# EAGLE board sensor_board_v4 (EAGLE 7.5.0)
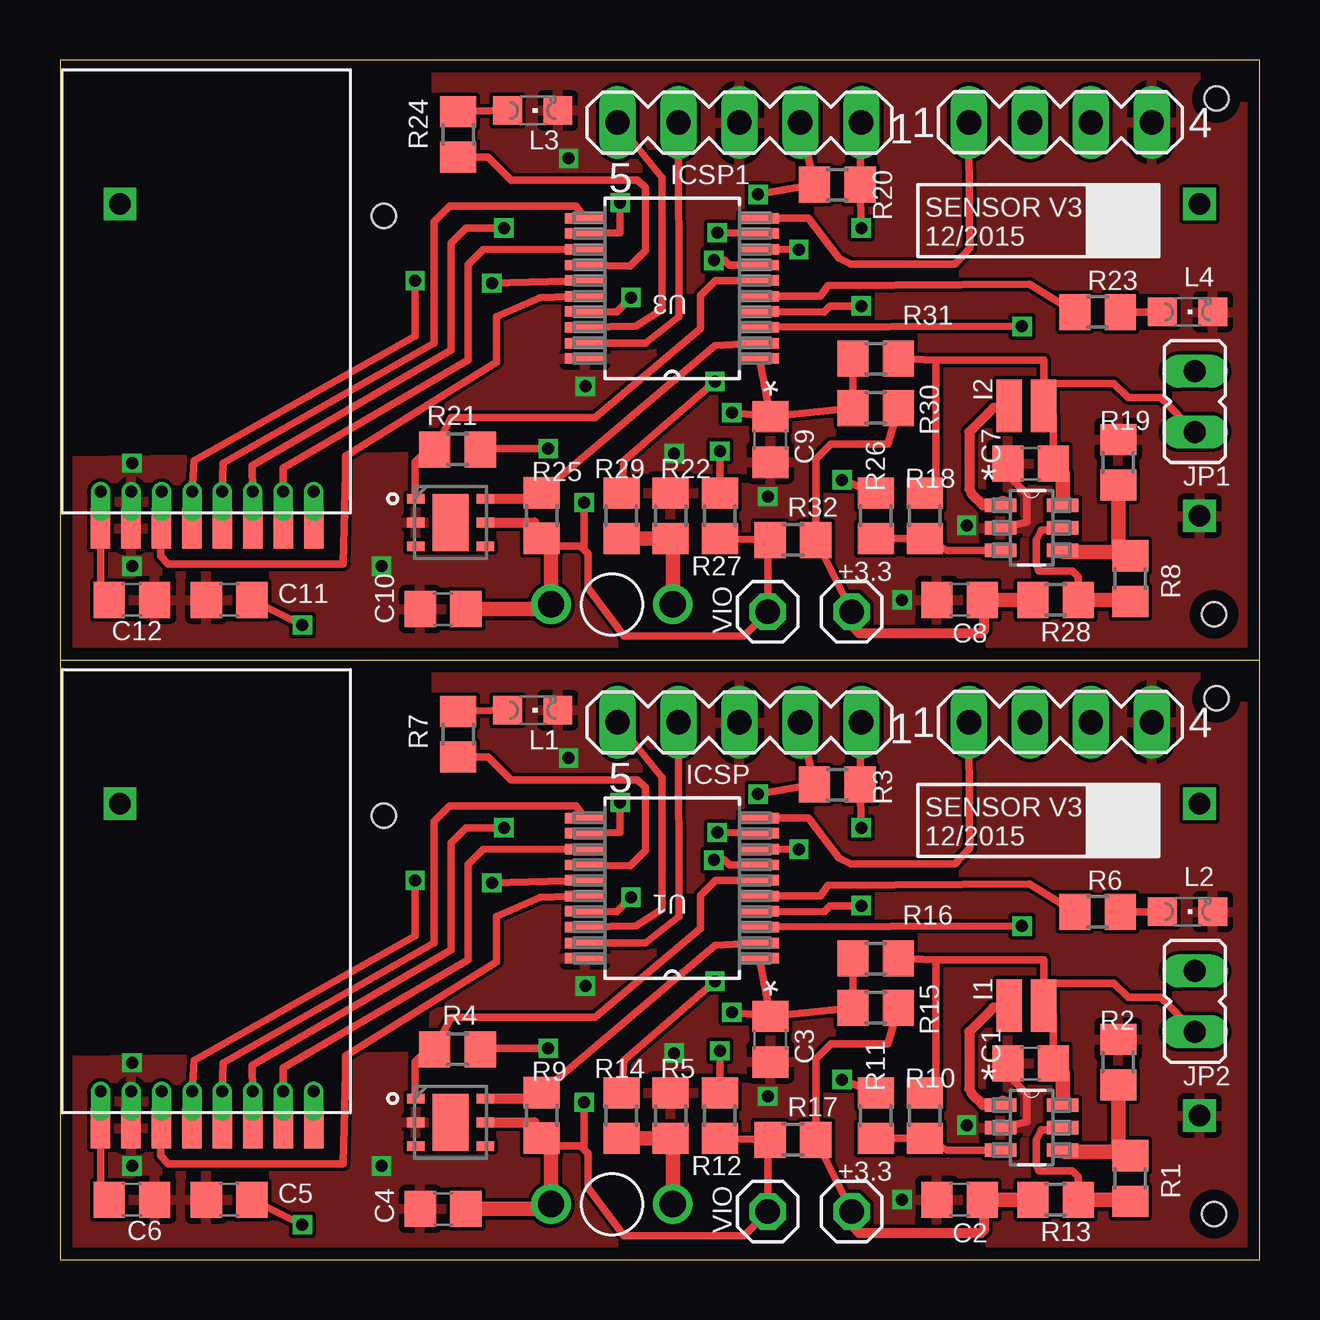
[diagram p0: board, top side]
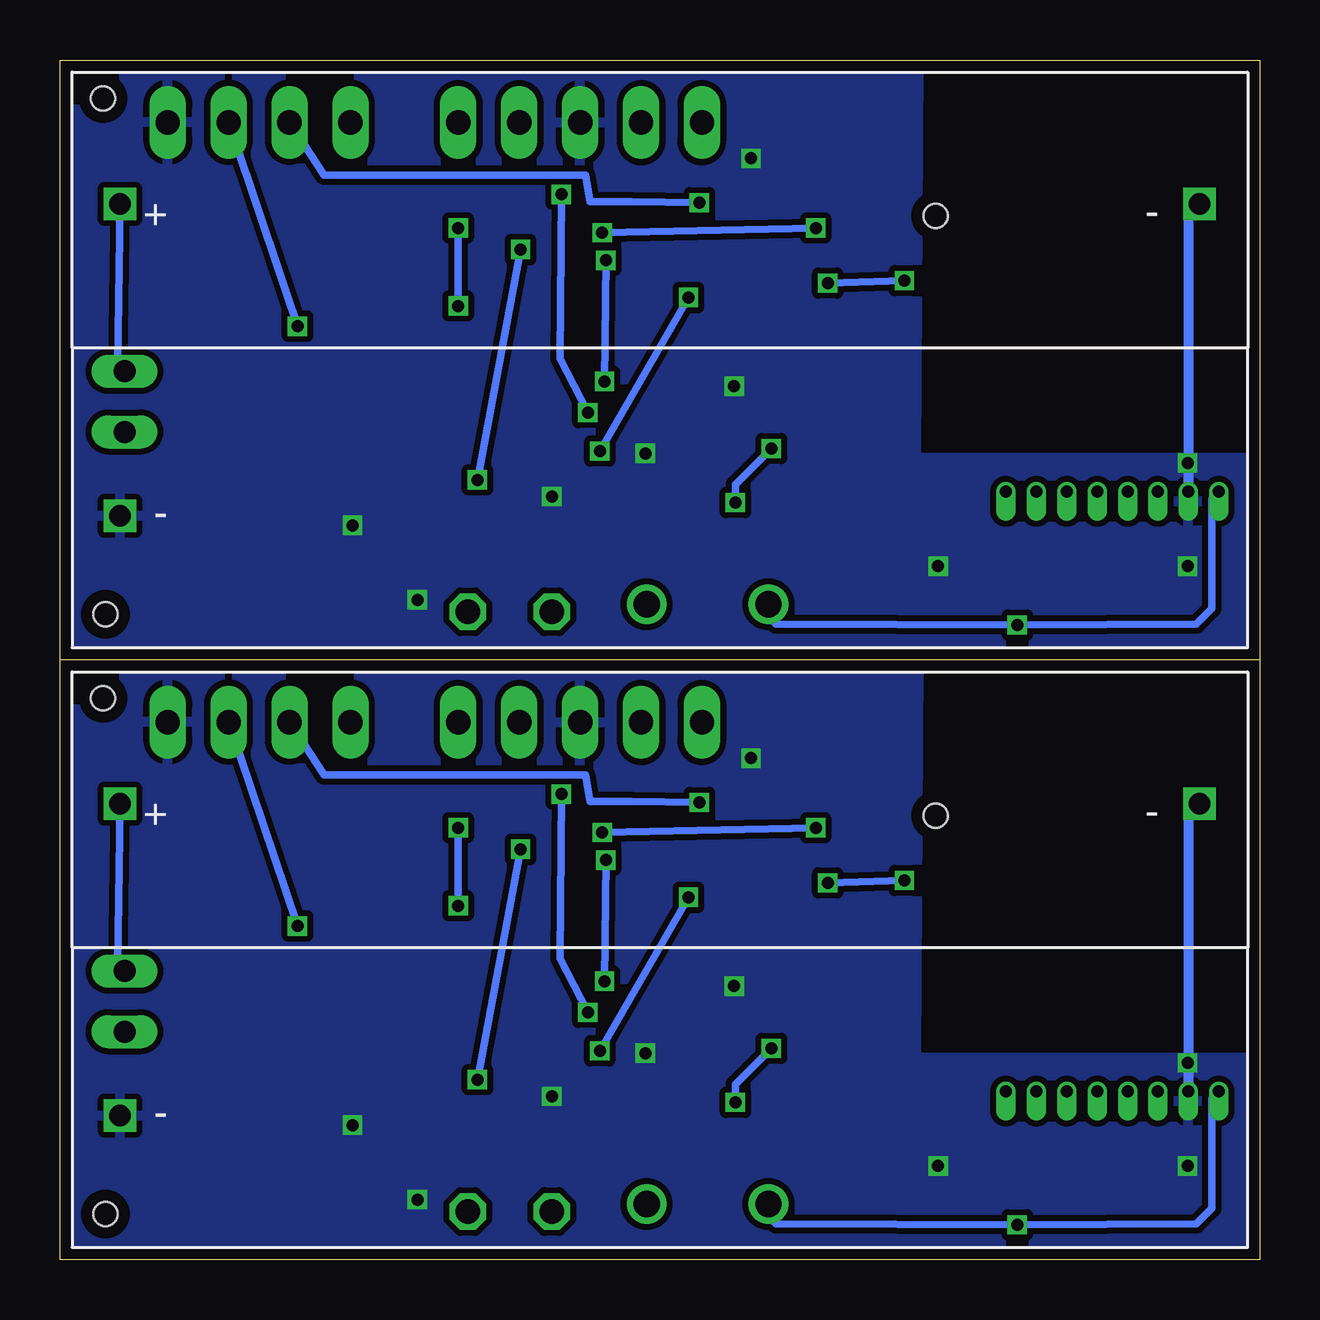
[diagram p1: board, bottom side, seen from below]

Size 50 x 50 mm. Coordinates in mm from the lower left corner, seen from the top.
Outline: 50,25 50,0 0,0 0,25
Outline: 50,25 50,50 0,50 0,25
Outline: 0,25 50,25
Copper layers (1*16): Top 0.035mm / dielectric 1.6mm / Bottom 0.035mm
Design rules "Elecrow_2-layer_PCB_eagle_rule": minimum track width 6mil, minimum drill 12mil, track to track 6mil, track to pad 6mil, pad to pad 6mil, via to via 8mil, smd to smd 0mil, copper to edge 20mil, drill to drill 10mil, minimum pad ring 6mil, minimum via ring 6mil, stop-mask expansion 0mil, vias tented up to drill 100mil, thermal gap 10mil
Holes 1 mm at 48.1,1.9 48.2,23.4 13.5,18.5 48.1,26.9 48.2,48.4 13.5,43.5

## Footprints (pad centres in the part's own frame; a part is rotated, then mirrored left to right if it is on the bottom)
C0805 = smd 1.3 x 1.5: 1 -0.95,0; 2 0.95,0
EPL2014 = smd 1.067 x 2.184: 1 1.448,0; 2 0,0
MA05-1 = drill 1.016 long: 1 -5.08,0; 2 -2.54,0; 3 0,0; 4 2.54,0; 5 5.08,0
JP1 = drill 0.914 long: 1 0,-1.27; 2 0,1.27
1X01 = drill 1.016 octagon: 1 0,0
CHIPLED_0805 = smd 1.2 x 1.2: A 0,-1.05; C 0,1.05
LDR = drill 1.1: 1 0,0; 2 5.08,0
NRF24L01-SMD = drill 0.5 pad 0.813 offset: CE -7.99,1.27; CSN -7.99,0; GND -7.99,2.54; IRQ -7.99,-5.08; MISO -7.99,-3.81; MOSI -7.99,-2.54; SCK -7.99,-1.27; VCC -7.99,3.81 | smd 1.676 x 0.813: CE1 -9.525,1.27; CSN1 -9.525,0; GND1 -9.525,2.54; IRQ1 -9.525,-5.08; MISO1 -9.525,-3.81; MOSI1 -9.525,-2.54; SCK1 -9.525,-1.27; VCC1 -9.525,3.81
R0805 = smd 1.3 x 1.5: 1 -0.95,0; 2 0.95,0
MA04-1 = drill 1.016 long: 1 -3.81,0; 2 -1.27,0; 3 1.27,0; 4 3.81,0
SOP65P780X200-20N = smd 1.651 x 0.432: 1 -3.632,2.921; 2 -3.632,2.286; 3 -3.632,1.626; 4 -3.632,0.965; 5 -3.632,0.33; 6 -3.632,-0.33; 7 -3.632,-0.965; 8 -3.632,-1.626; 9 -3.632,-2.286; 10 -3.632,-2.921; 11 3.632,-2.921; 12 3.632,-2.286; 13 3.632,-1.626; 14 3.632,-0.965; 15 3.632,-0.33; 16 3.632,0.33; 17 3.632,0.965; 18 3.632,1.626; 19 3.632,2.286; 20 3.632,2.921
DFN300X300X110-7N = smd 0.711 x 0.406: 1 -1.448,0.991; 2 -1.448,0; 3 -1.448,-0.991; 4 1.448,-0.991; 5 1.448,0; 6 1.448,0.991 | smd 1.499 x 2.388: 7 0,0
SOT95P270X145-6N = smd 1.321 x 0.559: 1 -1.295,0.94; 2 -1.295,0; 3 -1.295,-0.94; 4 1.295,-0.94; 5 1.295,0; 6 1.295,0.94
BATT = drill 0.9 square: GND -23,7; GND1 22,-6; VDD -23,-6

## Placement (x,y rotation side)
C1  10uF  [C0805]  40.46,8.17 180 top
C2  10uF  [C0805]  37.5,2.5 180 top
C3  100nF  [C0805]  29.61,9.18 270 top
C4  100nF  [C0805]  15.97,2.11 0 top
C5  10uF  [C0805]  7.05,2.5 0 top
C6  100nF  [C0805]  3,2.5 180 top
C7  10uF  [C0805]  40.46,33.17 180 top
C8  10uF  [C0805]  37.5,27.5 180 top
C9  100nF  [C0805]  29.61,34.18 270 top
C10  100nF  [C0805]  15.97,27.11 0 top
C11  10uF  [C0805]  7.05,27.5 0 top
C12  100nF  [C0805]  3,27.5 180 top
I1  [EPL2014]  39.56,10.58 0 top
I2  [EPL2014]  39.56,35.58 0 top
ICSP  [MA05-1]  28.32,22.39 180 top
ICSP1  [MA05-1]  28.32,47.39 180 top
JP1  [JP1]  47.31,35.76 180 top
JP2  [JP1]  47.31,10.76 180 top
JP3  [1X01]  29.5,27 0 top
JP4  [1X01]  29.5,2 0 top
JP5  [1X01]  33,2 0 top
JP6  [1X01]  33,27 0 top
L1  RED  [CHIPLED_0805]  19.7,22.9 270 top
L2  GREEN  [CHIPLED_0805]  47,14.5 270 top
L3  RED  [CHIPLED_0805]  19.7,47.9 270 top
L4  GREEN  [CHIPLED_0805]  47,39.5 270 top
LDR1  [LDR]  20.47,2.31 0 top
LDR2  [LDR]  20.47,27.31 0 top
M1  WIRELESS-NRF24L01SMD  [NRF24L01-SMD]  5.5,15 90 top
M2  WIRELESS-NRF24L01SMD  [NRF24L01-SMD]  5.5,40 90 top
R1  976k  [R0805]  44.61,3.38 270 top
R2  562k  [R0805]  44.11,8.23 270 top
R3  10k  [R0805]  32.4,19.8 180 top
R4  10k  [R0805]  16.57,8.77 180 top
R5  50k  [R0805]  25.45,6 270 top
R6  50R  [R0805]  43.25,14.5 0 top
R7  50R  [R0805]  16.6,21.9 90 top
R8  976k  [R0805]  44.61,28.38 270 top
R9  10k  [R0805]  20.08,6.01 270 top
R10  976k  [R0805]  36.05,6 90 top
R11  0R  [R0805]  34,6 90 top
R12  0R  [R0805]  27.5,6 90 top
R13  0R  [R0805]  41.5,2.5 0 top
R14  10k  [R0805]  23.4,6 90 top
R15  0R  [R0805]  34,10.5 180 top
R16  0R  [R0805]  34,12.55 180 top
R17  0R  [R0805]  30.55,5 0 top
R18  976k  [R0805]  36.05,31 90 top
R19  562k  [R0805]  44.11,33.23 270 top
R20  10k  [R0805]  32.4,44.8 180 top
R21  10k  [R0805]  16.57,33.77 180 top
R22  50k  [R0805]  25.45,31 270 top
R23  50R  [R0805]  43.25,39.5 0 top
R24  50R  [R0805]  16.6,46.9 90 top
R25  10k  [R0805]  20.08,31.01 270 top
R26  0R  [R0805]  34,31 90 top
R27  0R  [R0805]  27.5,31 90 top
R28  0R  [R0805]  41.5,27.5 0 top
R29  10k  [R0805]  23.4,31 90 top
R30  0R  [R0805]  34,35.5 180 top
R31  0R  [R0805]  34,37.55 180 top
R32  0R  [R0805]  30.55,30 0 top
SV1  [MA04-1]  41.7,47.4 0 top
SV2  [MA04-1]  41.7,22.4 0 top
U1  PIC16LF1509-I/SS  [SOP65P780X200-20N]  25.52,15.48 180 top
U2  SHT21  [DFN300X300X110-7N]  16.28,5.72 0 top
U3  PIC16LF1509-I/SS  [SOP65P780X200-20N]  25.52,40.48 180 top
U4  SHT21  [DFN300X300X110-7N]  16.28,30.72 0 top
U$1  MCP1640CT-I/CHY  [SOT95P270X145-6N]  40.5,30.5 0 top
U$2  BATTAAA  [BATT]  24.5,13 180 top
U$3  BATTAAA  [BATT]  24.5,38 180 top
U$4  MCP1640CT-I/CHY  [SOT95P270X145-6N]  40.5,5.5 0 top

## Library data of the parts
C1-C12 R1-R32 = resistor
I1 I2 LDR1 LDR2 = user
ICSP ICSP1 SV1 SV2 = con-lstb; OC_FARNELL: unknown; OC_NEWARK: unknown
JP1 JP2 = jumper
JP3-JP6 = pinhead
L1-L4 = led
M1 M2 = diy-modules
U1 U3 = user; MPN: PIC16LF1509-I/SS; OC_FARNELL: 2085029; OC_NEWARK: 64T1073; PACKAGE: SSOP-20; SUPPLIER: MICROCHIP
U2 U4 = sht21; MPN: SHT21; OC_FARNELL: 1855468; OC_NEWARK: 20T1172; PACKAGE: DFN-6; SUPPLIER: SENSIRION
U$1 U$4 = mcp1640; MPN: MCP1640T-I/CHY; OC_FARNELL: 1800208; OC_NEWARK: 73R3626; PACKAGE: SOT-6; SUPPLIER: Microchip
U$2 U$3 = batteryaaa

## Nets
+3V1: C8.1 JP6.1 R28.1 R30.1 R32.2
+3V3: C2.1 JP5.1 R13.1 R15.1 R17.2
ALTPWR: R12.2 U1.17
ALTPWR1: R27.2 U3.17
GND: C1.2 C2.2 C3.2 C4.1 C5.1 C6.1 ICSP.3 L1.C L2.C M1.GND M1.GND1 R2.1 R5.1 SV2.4 U1.20 U2.2 U$2.GND U$2.GND1 U$4.2
GND1: C7.2 C8.2 C9.2 C10.1 C11.1 C12.1 ICSP1.3 L3.C L4.C M2.GND M2.GND1 R19.1 R22.1 SV1.4 U3.20 U4.2 U$1.2 U$3.GND U$3.GND1
LDR_DATA: R14.2 U1.7
LDR_DATA1: R29.2 U3.7
LED_G: R6.1 U1.5
LED_G1: R23.1 U3.5
LED_R: R7.1 U1.14
LED_R1: R24.1 U3.14
N$1: I1.2 U$4.1
N$2: R1.1 R2.2 U$4.4
N$3: JP2.1 U$2.VDD
N$4: R10.1 R11.1 U$4.3
N$5: ICSP.4 U1.19
N$6: L2.A R6.2
N$7: L1.A R7.2
N$8: ICSP.5 U1.18
N$9: ICSP.1 R3.1 U1.4
N$10: C3.1 ICSP.2 R3.2 R15.2 R16.2 U1.1
N$11: LDR1.2 R5.2 R14.1
N$12: R8.1 R19.2 U$1.4
N$13: R1.2 R13.2 U$4.5
N$14: L4.A R23.2
N$15: L3.A R24.2
N$16: ICSP1.4 U3.19
N$17: ICSP1.5 U3.18
N$18: ICSP1.1 R20.1 U3.4
N$19: I2.2 U$1.1
N$20: JP1.1 U$3.VDD
N$21: R8.2 R28.2 U$1.5
N$22: C9.1 ICSP1.2 R20.2 R30.2 R31.2 U3.1
N$23: LDR2.2 R22.2 R29.1
N$24: R18.1 R26.1 U$1.3
PWR_EN: R11.2 U1.8
PWR_EN1: R26.2 U3.8
RF_CE: M1.CE M1.CE1 U1.16
RF_CE1: M2.CE M2.CE1 U3.16
RF_CSN: M1.CSN M1.CSN1 U1.15
RF_CSN1: M2.CSN M2.CSN1 U3.15
RF_MISO: M1.MISO M1.MISO1 U1.13
RF_MISO1: M2.MISO M2.MISO1 U3.13
RF_MOSI: M1.MOSI M1.MOSI1 U1.9
RF_MOSI1: M2.MOSI M2.MOSI1 U3.9
RF_SCK: M1.SCK M1.SCK1 U1.11
RF_SCK1: M2.SCK M2.SCK1 U3.11
RX: SV2.2 U1.12
RX1: SV1.2 U3.12
SHT_SCL: R9.1 U1.2 U2.6
SHT_SCL1: R25.1 U3.2 U4.6
SHT_SDA: R4.2 U1.6 U2.1
SHT_SDA1: R21.2 U3.6 U4.1
SPARE: SV2.3 U1.3
SPARE1: SV1.3 U3.3
TX: SV2.1 U1.10
TX1: SV1.1 U3.10
VCCIO: C4.2 C5.2 C6.2 JP4.1 LDR1.1 M1.VCC M1.VCC1 R4.1 R9.2 R12.1 R17.1 U2.5
VCCIO1: C10.2 C11.2 C12.2 JP3.1 LDR2.1 M2.VCC M2.VCC1 R21.1 R25.2 R27.1 R32.1 U4.5
VDD: C1.1 I1.1 JP2.2 R10.2 R16.1 U$4.6
VDD1: C7.1 I2.1 JP1.2 R18.2 R31.1 U$1.6

## Tracks (layer width: path | path; a pad name or v marks a point on that pad's centre or on a via)
+3V1
  Top 0.305: C8.1 38.5,27.45 | 38.5,26.2 38.4,26.1 | JP6.1 R32.2 31.5,33.37 32.13,34 34.5,34 R30.1
  Top 0.406: 38.5,27.45 38.5,26.2 | 38.4,26.1 33.32,26.1 33,26.42 JP6.1
  Top 0.61: C8.1 R28.1
+3V3
  Top 0.305: C2.1 38.5,2.45 | 38.5,1.2 38.4,1.1 | JP5.1 R17.2 31.5,8.37 32.13,9 34.5,9 R15.1
  Top 0.406: 38.5,2.45 38.5,1.2 | 38.4,1.1 33.32,1.1 33,1.42 JP5.1
  Top 0.61: C2.1 R13.1
ALTPWR  (via drill 0.5)
  Top 0.305: R12.2 v27.5,8.7 | U1.17 23.2,14.5 v23.8,15.1
  Bottom 0.305: v27.5,8.7 v23.8,15.1
ALTPWR1  (via drill 0.5)
  Top 0.305: R27.2 v27.5,33.7 | U3.17 23.2,39.5 v23.8,40.1
  Bottom 0.305: v27.5,33.7 v23.8,40.1
GND  (via drill 0.5)
  Top 0.305: U$4.2 40.3,5.75 40.3,6.9 39.51,7.69 C1.2
  Bottom 0.406: U$2.GND1 2.96,19 M1.GND
  other vias: 37.8,5.6 29.5,6.8 35.1,2.5 13.4,3.9 21.9,11.4 21.2,20.9 25.6,8.6 3,3.9 3,8.2
  pour Bottom (isolate 0.254): 14.2,24.9 49.8,25 49.4,0.2 14.1,0.3 0.5,0.3 0.4,8.4 14.3,8.4 14.3,8.5
  pour Top: 15.7,25.1 49.8,25 49.4,0.2 0.4,0.4 0.4,8.3 15.6,8.5
GND1  (via drill 0.5)
  Top 0.305: U$1.2 40.3,30.75 40.3,31.9 39.51,32.69 C7.2
  Bottom 0.406: U$3.GND1 2.96,44 M2.GND
  other vias: 37.8,30.6 29.5,31.8 35.1,27.5 13.4,28.9 21.9,36.4 21.2,45.9 25.6,33.6 3,28.9 3,33.2
  pour Bottom (isolate 0.254): 14.2,49.9 49.8,50 49.4,25.2 14.1,25.3 0.5,25.3 0.4,33.4 14.3,33.4 14.3,33.5
  pour Top: 15.7,50.1 49.8,50 49.4,25.2 0.4,25.4 0.4,33.3 15.6,33.5
LDR_DATA  (via drill 0.5)
  Top 0.305: R14.2 23.5,8.3 v27.3,11.6 | v27.25,16.65 27.7,16.65 27.9,16.45 U1.7
  Bottom 0.305: v27.3,11.6 v27.25,16.65
LDR_DATA1  (via drill 0.5)
  Top 0.305: R29.2 23.5,33.3 v27.3,36.6 | v27.25,41.65 27.7,41.65 27.9,41.45 U3.7
  Bottom 0.305: v27.3,36.6 v27.25,41.65
LED_G
  Top 0.305: U1.5 31.7,15.15 32,15.6 40.4,15.65 R6.1
LED_G1
  Top 0.305: U3.5 31.7,40.15 32,40.6 40.4,40.65 R23.1
LED_R
  Top 0.305: R7.1 17.85,20.95 18.8,20 24.08,20 24.4,19.68 24.4,17.05 23.75,16.41 U1.14
LED_R1
  Top 0.305: R24.1 17.85,45.95 18.8,45 24.08,45 24.4,44.68 24.4,42.05 23.75,41.41 U3.14
N$1
  Top 0.406: I1.2 39.48,10.5 38.9,10.5 37.9,9.5 37.9,7.13 37.99,6.91 38.46,6.44 U$4.1
  Top 0.61: U$4.1 39.3,6.54
N$2
  Top 0.61: R1.1 44.11,4.33 44.11,4.5 | 44.11,4.5 R2.2 | U$4.4 41.86,4.5 44.11,4.5
N$3
  Bottom 0.305: JP2.1 47.6,12.32 U$2.VDD
N$4
  Top 0.305: U$4.3 36.99,4.56 R10.1 R11.1
N$5
  Top 0.305: ICSP.4 25.8,14.3 24.4,13.2 U1.19
N$6
  Top 0.305: L2.A R6.2
N$7
  Top 0.305: R7.2 L1.A
N$8
  Top 0.305: U1.18 24,13.9 25.1,14.6 25.1,20.1 ICSP.5
N$9  (via drill 0.5)
  Top 0.305: ICSP.1 R3.1 v33.4,18 | U1.4 31.85,14.5 32.1,14.75 v33.4,14.75
  Bottom 0.305: v33.4,14.75 v33.4,18
N$10  (via drill 0.5)
  Top 0.305: R16.2 R15.2 C3.1 | U1.1 C3.1 | ICSP.2 R3.2 v29.1,19.4 | v28,10.3 C3.1
  Bottom 0.305: v29.1,19.4 U1.1 v28,10.3
N$11
  Top 0.305: R5.2 25.55,5
  Top 0.61: 25.55,5 LDR1.2 | R14.1 R5.2
N$12
  Top 0.61: R8.1 44.11,29.33 44.11,29.5 | 44.11,29.5 R19.2 | U$1.4 41.86,29.5 44.11,29.5
N$13
  Top 0.305: R13.2 42.45,3.45 42.2,3.7 40.8,3.7 40.7,4 40.7,5 40.9,5.4 41.7,5.4 U$4.5
  Top 0.61: R13.2 44.61,2.5 R1.2
N$14
  Top 0.305: L4.A R23.2
N$15
  Top 0.305: R24.2 L3.A
N$16
  Top 0.305: ICSP1.4 25.8,39.3 24.4,38.2 U3.19
N$17
  Top 0.305: U3.18 24,38.9 25.1,39.6 25.1,45.1 ICSP1.5
N$18  (via drill 0.5)
  Top 0.305: ICSP1.1 R20.1 v33.4,43 | U3.4 31.85,39.5 32.1,39.75 v33.4,39.75
  Bottom 0.305: v33.4,39.75 v33.4,43
N$19
  Top 0.406: I2.2 39.48,35.5 38.9,35.5 37.9,34.5 37.9,32.13 37.99,31.91 38.46,31.44 U$1.1
  Top 0.61: U$1.1 39.3,31.54
N$20
  Bottom 0.305: JP1.1 47.6,37.32 U$3.VDD
N$21
  Top 0.305: R28.2 42.45,28.45 42.2,28.7 40.8,28.7 40.7,29 40.7,30 40.9,30.4 41.7,30.4 U$1.5
  Top 0.61: R28.2 44.61,27.5 R8.2
N$22  (via drill 0.5)
  Top 0.305: R31.2 R30.2 C9.1 | U3.1 C9.1 | ICSP1.2 R20.2 v29.1,44.4 | v28,35.3 C9.1
  Bottom 0.305: v29.1,44.4 U3.1 v28,35.3
N$23
  Top 0.305: R22.2 25.55,30
  Top 0.61: 25.55,30 LDR2.2 | R29.1 R22.2
N$24
  Top 0.305: U$1.3 36.99,29.56 R18.1 R26.1
PWR_EN  (via drill 0.5)
  Top 0.305: R11.2 v32.6,7.5 | v30.8,17.1 U1.8
  Bottom 0.305: v32.6,7.5 v30.8,17.1
PWR_EN1  (via drill 0.5)
  Top 0.305: R26.2 v32.6,32.5 | v30.8,42.1 U3.8
  Bottom 0.305: v32.6,32.5 v30.8,42.1
RF_CE
  Top 0.305: M1.CE1 M1.CE 4.2,4.32 4.52,4 11.8,4 11.9,7.8 11.9,8.5 18.2,12.4 18.2,14.3 20,15.1 U1.16
RF_CE1
  Top 0.305: M2.CE1 M2.CE 4.2,29.32 4.52,29 11.8,29 11.9,32.8 11.9,33.5 18.2,37.4 18.2,39.3 20,40.1 U3.16
RF_CSN  (via drill 0.5)
  Top 0.305: M1.CSN1 M1.CSN 5.6,8.3 14.8,13.5 v14.8,15.8 | v18,15.7 U1.15
  Bottom 0.305: v14.8,15.8 v18,15.7
RF_CSN1  (via drill 0.5)
  Top 0.305: M2.CSN1 M2.CSN 5.6,33.3 14.8,38.5 v14.8,40.8 | v18,40.7 U3.15
  Bottom 0.305: v14.8,40.8 v18,40.7
RF_MISO
  Top 0.305: M1.MISO1 M1.MISO 9.3,8 17,12.5 17,16.47 17.63,17.1 U1.13
RF_MISO1
  Top 0.305: M2.MISO1 M2.MISO 9.3,33 17,37.5 17,41.47 17.63,42.1 U3.13
RF_MOSI  (via drill 0.5)
  Top 0.305: M1.MOSI1 M1.MOSI 8,8.1 16.3,12.9 16.3,17.36 16.93,18 v18.5,18 | v27.4,17.8 U1.9
  Bottom 0.305: v18.5,18 v27.4,17.8
RF_MOSI1  (via drill 0.5)
  Top 0.305: M2.MOSI1 M2.MOSI 8,33.1 16.3,37.9 16.3,42.37 16.93,43 v18.5,43 | v27.4,42.8 U3.9
  Bottom 0.305: v18.5,43 v27.4,42.8
RF_SCK
  Top 0.305: M1.SCK1 M1.SCK 6.8,8.2 15.6,13.2 15.6,18.27 16.23,18.9 21.5,18.9 U1.11
RF_SCK1
  Top 0.305: M2.SCK1 M2.SCK 6.8,33.2 15.6,38.2 15.6,43.27 16.23,43.9 21.5,43.9 U3.11
RX  (via drill 0.5)
  Top 0.305: U1.12 23.35,17.8 v23.35,19.05
  Bottom 0.305: v23.35,19.05 26.2,19.1 27.9,19.1 28.1,20.2 39,20.2 SV2.2
RX1  (via drill 0.5)
  Top 0.305: U3.12 23.35,42.8 v23.35,44.05
  Bottom 0.305: v23.35,44.05 26.2,44.1 27.9,44.1 28.1,45.2 39,45.2 SV1.2
SHT_SCL
  Top 0.305: 19.83,6.71 R9.1 27.3,13.1 U1.2
  Top 0.406: U2.6 19.83,6.71
SHT_SCL1
  Top 0.305: 19.83,31.71 R25.1 27.3,38.1 U3.2
  Top 0.406: U4.6 19.83,31.71
SHT_SDA
  Top 0.305: U1.6 27.33,15.8 26.7,15.17 26.7,13.8 22.3,10.1 16.3,10.1 R4.2 15.32,8.77 14.8,8.25 14.8,6.74 U2.1
SHT_SDA1
  Top 0.305: U3.6 27.33,40.8 26.7,40.17 26.7,38.8 22.3,35.1 16.3,35.1 R21.2 15.32,33.77 14.8,33.25 14.8,31.74 U4.1
SPARE  (via drill 0.5)
  Top 0.305: U1.3 v40.1,13.9
  Bottom 0.305: v40.1,13.9 SV2.3
SPARE1  (via drill 0.5)
  Top 0.305: U3.3 v40.1,38.9
  Bottom 0.305: v40.1,38.9 SV1.3
TX
  Top 0.305: SV2.1 37.9,18.4 37.93,17.15 37.3,16.5 32.96,16.5 32.46,16.75 31.2,18.4 U1.10
TX1
  Top 0.305: SV1.1 37.9,43.4 37.93,42.15 37.3,41.5 32.96,41.5 32.46,41.75 31.2,43.4 U3.10
VCCIO  (via drill 0.5)
  Top 0.305: 19.76,5.72 20.08,5.4 R9.2 20.15,5.06 20.47,4.74 21.68,4.74 21.84,4.59 | 20.27,2.11 LDR1.1 | M1.VCC1 1.73,5.47 1.69,5.52 | 21.84,4.59 22,4.42 22,3 23.5,1 28.5,1 JP4.1 29.5,4.95 R17.1 R12.1 | v10.1,1.45 C5.2 | 1.69,5.52 M1.VCC | C6.2 1.69,2.86 1.69,5.52 | R4.1 17.55,8.8 v20.35,8.8 | v21.85,6.55 21.84,6.54 21.84,4.59
  Top 0.406: U2.5 19.76,5.72
  Top 0.61: 20.47,4.74 LDR1.1 | C4.2 20.27,2.11
  Bottom 0.305: M1.VCC 2,6.7 2,2.13 2.63,1.5 v10.1,1.45 20.15,1.5 20.47,1.82 LDR1.1 | v20.35,8.8 21.85,7.3 v21.85,6.55
VCCIO1  (via drill 0.5)
  Top 0.305: 19.76,30.72 20.08,30.4 R25.2 20.15,30.06 20.47,29.74 21.68,29.74 21.84,29.59 | 20.27,27.11 LDR2.1 | M2.VCC1 1.73,30.48 1.69,30.52 | 21.84,29.59 22,29.43 22,28 23.5,26 28.5,26 JP3.1 29.5,29.95 R32.1 R27.1 | v10.1,26.45 C11.2 | 1.69,30.52 M2.VCC | C12.2 1.69,27.86 1.69,30.52 | R21.1 17.55,33.8 v20.35,33.8 | v21.85,31.55 21.84,31.54 21.84,29.59
  Top 0.406: U4.5 19.76,30.72
  Top 0.61: 20.47,29.74 LDR2.1 | C10.2 20.27,27.11
  Bottom 0.305: M2.VCC 2,31.7 2,27.13 2.63,26.5 v10.1,26.45 20.15,26.5 20.47,26.82 LDR2.1 | v20.35,33.8 21.85,32.3 v21.85,31.55
VDD
  Top 0.305: R16.1 36.5,12.5 | 36.5,12.5 36.5,7 R10.2 | 36.5,12.5 41,12.5 41.01,12.49 41.01,11.52 | 41.01,11.52 I1.1 41.41,10.18 C1.1 | JP2.2 45.88,10.92 44.53,10.92 43.93,11.52 41.01,11.52
  Top 0.61: C1.1 41.8,7.79 U$4.6
VDD1
  Top 0.305: R31.1 36.5,37.5 | 36.5,37.5 36.5,32 R18.2 | 36.5,37.5 41,37.5 41.01,37.49 41.01,36.52 | 41.01,36.52 I2.1 41.41,35.18 C7.1 | JP1.2 45.88,35.92 44.53,35.92 43.93,36.52 41.01,36.52
  Top 0.61: C7.1 41.8,32.78 U$1.6

## Text on the board
tNames: SENSOR V3 / 12/2015 | +3.3 | VIO | SENSOR V3 / 12/2015 | +3.3 | VIO